# Altium PCB F_300.PcbDoc (part 2 of 3)
Units mil, origin at the board's own origin, x right, y up, seen from the top; angles counter-clockwise.
Board outline 3770 x 3800 mil, 4 copper layers (Top Layer, DGND, VCC, Bottom Layer), stack 30.634 mil thick; 207 components, 290 nets, 1124 pads, 648 vias.
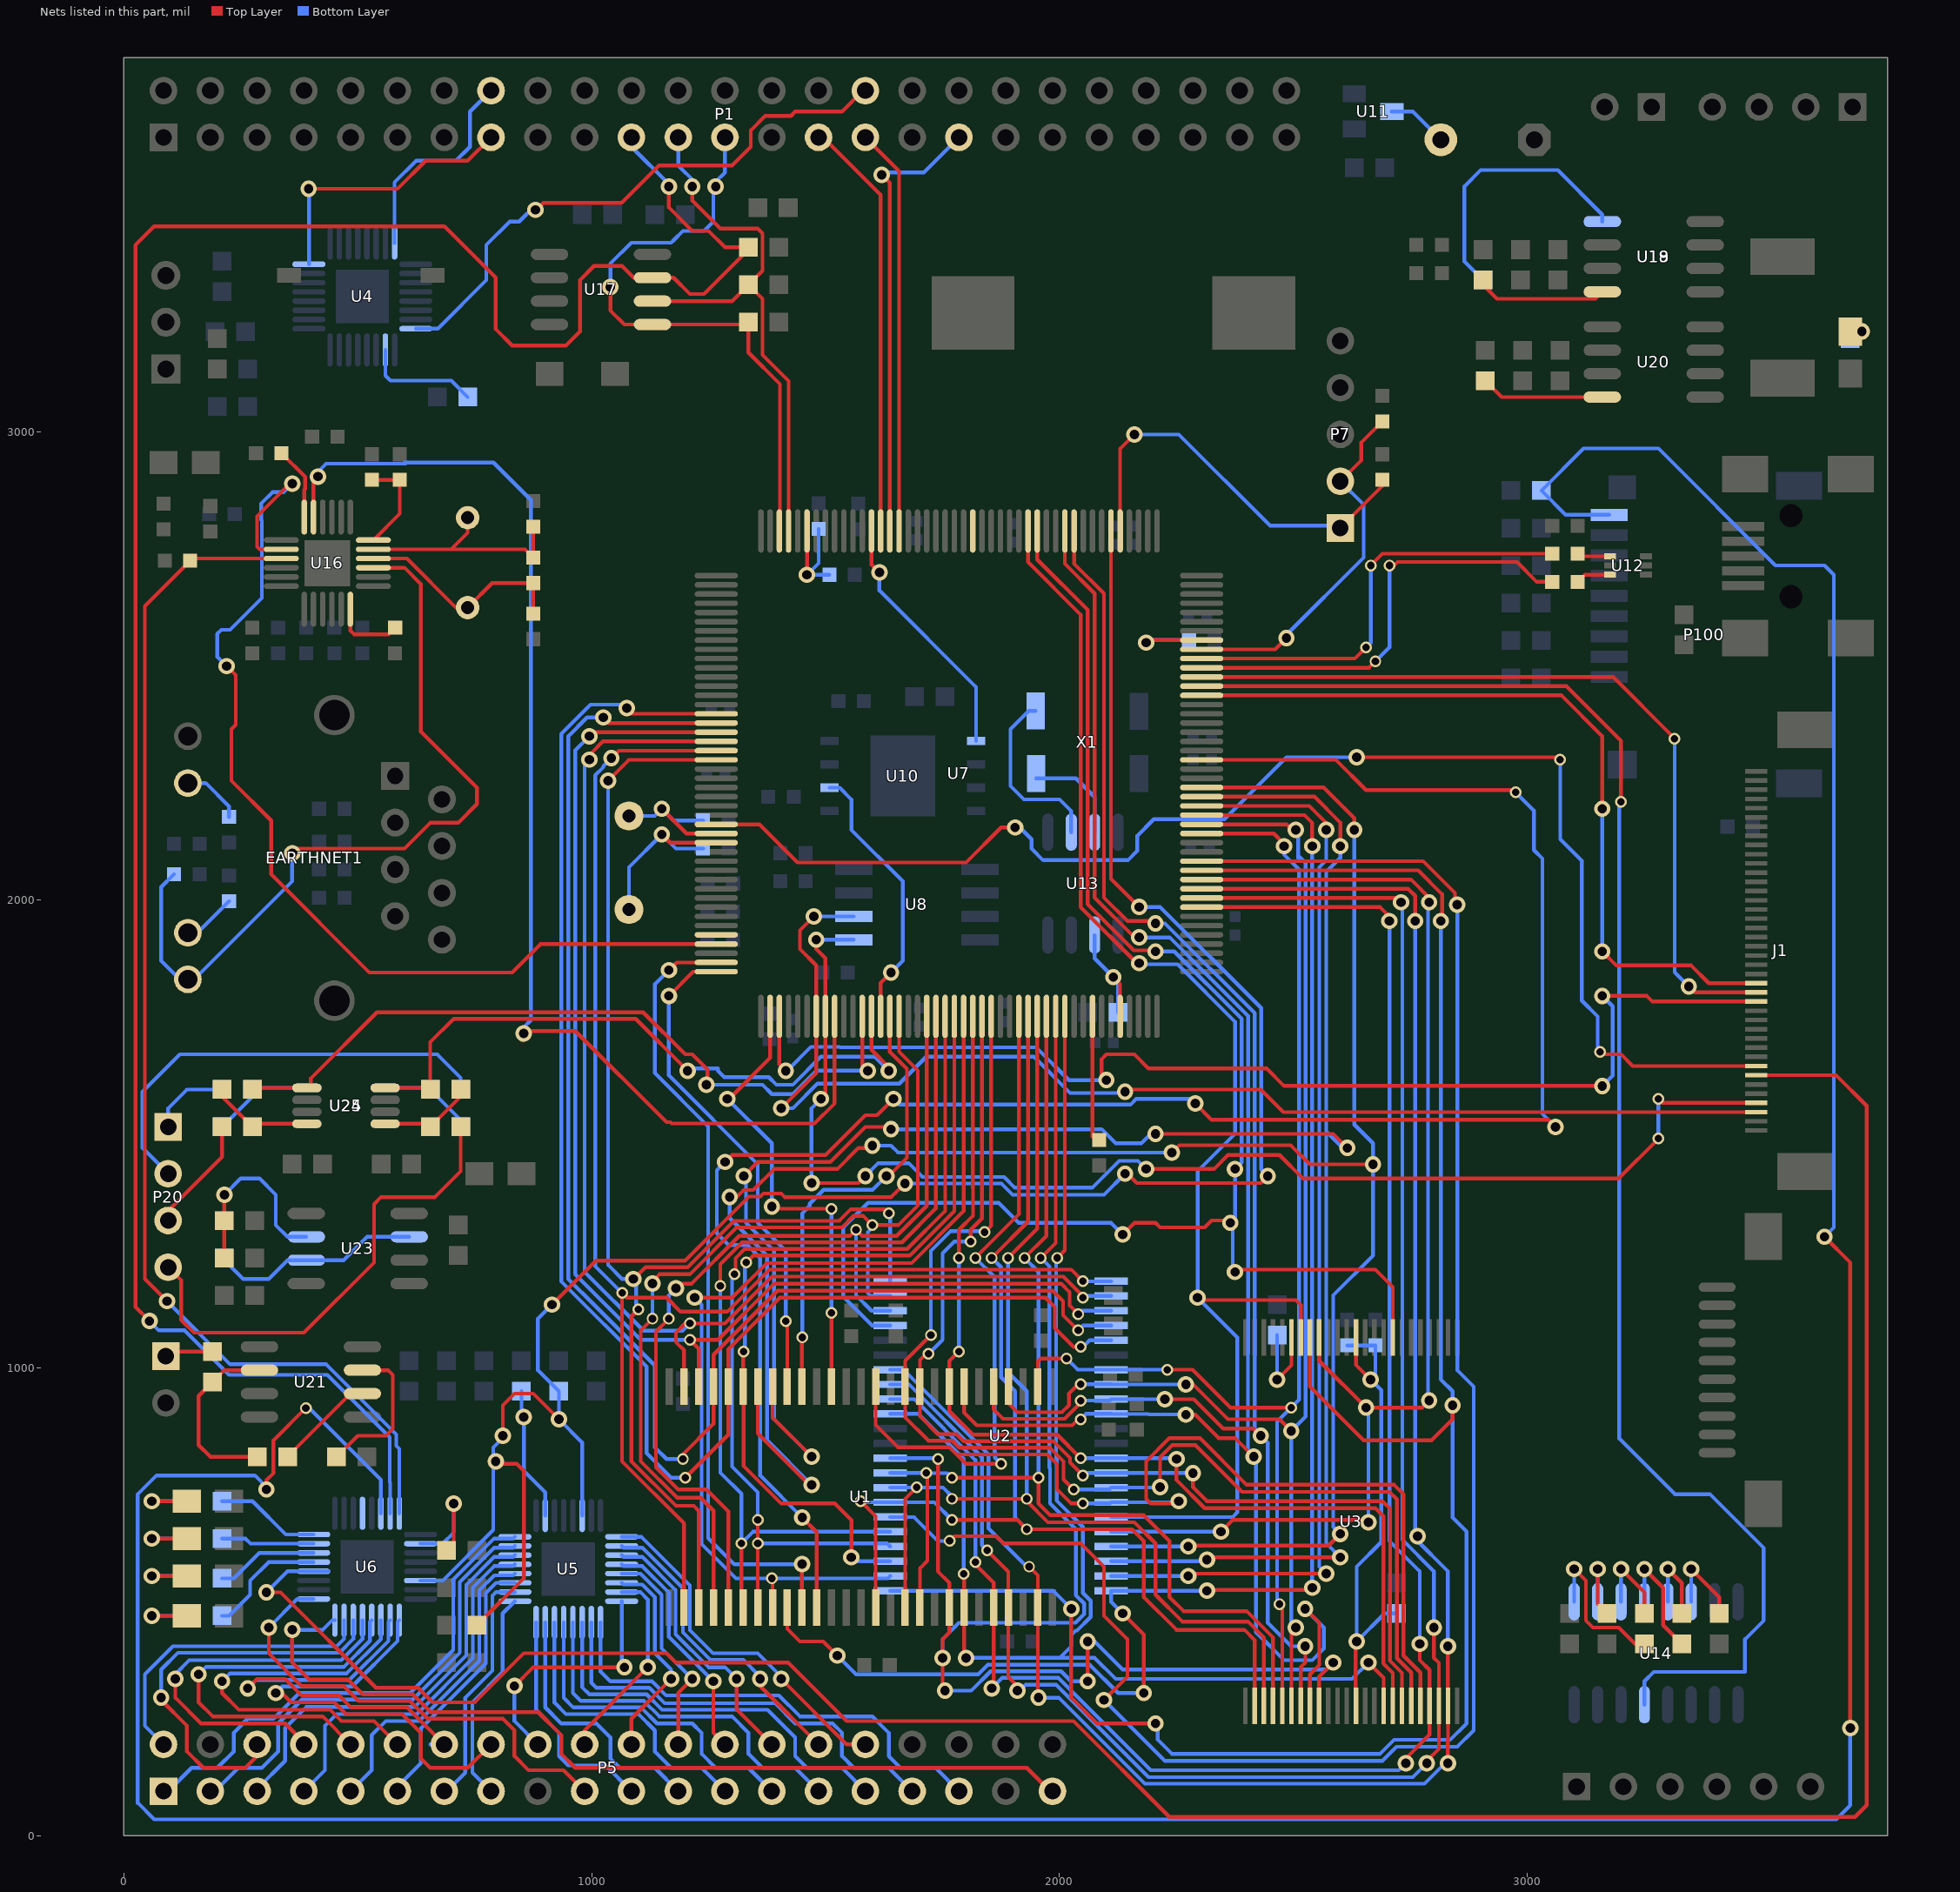
[diagram p4: the nets of this part, all layers, seen from the top]

## Via types
v1: diameter 35, hole 20, Top Layer to Bottom Layer, 496 vias
v2: diameter 25, hole 16, Top Layer to Bottom Layer, 109 vias
v3: diameter 19.68, hole 7.87, Top Layer to Bottom Layer, 31 vias
v4: diameter 120, hole 120, Top Layer to Bottom Layer, 5 vias
v5: diameter 50, hole 28, Top Layer to Bottom Layer, 3 vias
v6: diameter 110, hole 110, Top Layer to Bottom Layer, 2 vias
v7: diameter 38, hole 28, Top Layer to Bottom Layer, 1 vias
v8: diameter 80, hole 50, Top Layer to Bottom Layer, 1 vias

## Nets (pads, with @x,y where several pads share a name; then routed paths per layer and width w, separated by ;. In a path a pad name is that pad's centre, name@x,y a point inside that pad or via, vN(x,y) a via of type N, cw(c..) or ccw(c..) an arc to the next point about the centre after c; other vN are vias at no path point) (continued)
ETH_RESET: R58.1 U6.24 U16.15 | length 2628.1
  Top Layer w8: v1(92.5,1142.5) 45,1190 45,2628 R58.1@142,2725 146.84,2729.84 U16.15@336.57,2729.84
  Bottom Layer w8: v1(92.5,1142.5) 87.5,1137.5 97.5,1137.5 227.5,1007.5 432.5,1007.5 582.5,857.5 582.5,833.61 588.98,827.13 U6.24@588.98,689.09
FREE1: P1.15 U4.8 | length 597.1
  Top Layer w8: v1(395,3520) 585,3520 645,3580 735,3580 P1.15@785,3630
  Bottom Layer w8: v1(395,3520) 395.75,3519.25 U4.8@395.75,3358.82
FREE2: P1.16 U4.16 | length 461.1
  Bottom Layer w8: U4.16@578.82,3404.09 578.82,3533.82 625,3580 710,3580 740,3610 740,3685 P1.16@785,3730
FREE3: P1.32 U4.24 | length 1240.3
  Top Layer w8: v1(880,3475) 881.5,3475 896.5,3490 1063.69,3490 1143.69,3570 1300,3570 1340,3610 1340,3645 1371,3676 1426,3676 1435,3685 1535,3685 1580,3730 P1.32@1585,3730
  Bottom Layer w8: U4.24@624.09,3221.02 671.02,3221.02 775,3325 775,3400 825,3450 845,3450 v1@880,3485
FSMC_A0: U1.23 U2.5 U7.16 | length 3338.2
  Top Layer w8: v1(1075,2410) 1075,2405 1082.05,2397.95 U7.16@1266.3,2397.95 ; v2(1200,765) 1292.09,857.09 U1.23@1292.09,960 1292.09,1040 1402.09,1150 1970,1150 1990,1130 1990,1085 2030,1045 v2(2045,1045)
  Bottom Layer w8: v1(1075,2410) 1067.5,2417.5 997.5,2417.5 935,2355 935,1185 1117.5,1002.5 1117.5,817.5 1170,765 v2(1200,765) ; v2(2045,1045) 2050,1045 2064.04,1059.04 U2.5@2110.35,1059.04
FSMC_A1: U1.24 U2.4 U7.17 | length 3208.8
  Top Layer w8: v1(1025,2390) 1036.73,2378.27 U7.17@1266.3,2378.27 ; v2@1195,815 1260.59,880.59 U1.24@1260.59,960 1260.59,1028.3 1397.29,1165 1985,1165 2007.5,1142.5 2007.5,1112.5 v2(2040,1080)
  Bottom Layer w8: v1(1025,2390) 990,2390 950,2350 950,1189.8 1004.8,1135 1005,1135 1135,1005 1135,830 1160,805 v2(1195,805) ; v2(2040,1080) 2050.54,1090.54 U2.4@2110.35,1090.54
FSMC_A2: U1.25 U2.3 U7.18 | length 2804.7
  Top Layer w8: v1(995,2350) 1003.58,2358.58 U7.18@1266.3,2358.58 ; 1229.09,1000 1229.09,1040.91 v2(1210,1060) 1270,1060 1390,1180 2003.38,1180 2021.5,1161.88 2021.5,1133.5 v2(2040,1115)
  Bottom Layer w8: v1(995,2350) 965,2320 965,1200 1105,1060 v2(1210,1060) ; v2(2040,1115) 2047.03,1122.03 U2.3@2110.35,1122.03
FSMC_A3: U1.26 U2.2 U7.19 | length 2803.7
  Top Layer w8: v1(995,2300) 995,2310 1023.9,2338.9 U7.19@1266.3,2338.9 ; U1.26@1197.6,960 1197.6,1037.4 1180,1055 1180,1075 1200,1095 v2(1210,1095) 1210.35,1094.65 1284.85,1094.65 1385.2,1195 1590,1195 1590,1196 1595,1196 ; 1595,1195 2008.18,1195 2050,1153.18 v2(2050,1150)
  Bottom Layer w8: v1(995,2300) 985,2290 985,1205 1110.8,1079.2 1194.2,1079.2 v2(1210,1095) ; v2@2046.47,1153.53 U2.2@2110.35,1153.53
FSMC_A4: U1.29 U2.1 U7.20 | length 3249.1
  Top Layer w8: v1(1041.95,2303.05) 1058.1,2319.21 U7.20@1266.3,2319.21 ; U1.29@1197.6,487.56 1197.6,667.4 1065,800 v2(1065,1160) 1075,1150 1160,1150 1190,1120 1290,1120 1380,1210 2025,1210 v2(2050,1185)
  Bottom Layer w8: v1(1041.95,2303.05) 1025,2286.11 1025,2283.89 1007.5,2266.39 1007.5,1217.5 v2(1065,1160) ; v2(2050,1185) U2.1@2110.35,1185.02
FSMC_A5: U1.30 U2.44 U7.21 | length 2913.3
  Top Layer w8: v1(1035,2255) 1079.53,2299.53 U7.21@1266.3,2299.53 ; v1(1089,1190) 1090,1190 1115,1215 1205.2,1215 1304.2,1314 1529,1314 1554,1339 1626,1339 v2(1635,1330) ; v2(1100,1125) 1085,1110 1085,800 1180,705 1218.19,705 1229.09,694.09 U1.30@1229.09,487.56
  Bottom Layer w8: v1(1035,2255) 1035,1220 1065,1190 v1(1089,1190) ; v1@1095,1190 1095,1130 v2(1100,1125) ; v2@1635,1335 v2@1637.91,1332.09 ; U2.44@1637.91,1185.02 1637.91,1302.91 ; 1640,1305 1637.91,1302.91 ; v2@1640,1335 1637.91,1332.91 v2@1637.91,1332.09 ; 1637.91,1302.91 v2@1637.91,1332.09
FSMC_A6: U1.31 U2.43 U7.60 | length 2072.9
  Top Layer w8: v2(1130,1105) 1105,1080 1105,800 1182.8,722.2 1232.8,722.2 1260.59,694.41 U1.31@1260.59,487.56 ; v1(1130,1180) 1130,1185 1145,1200 1210,1200 1310,1300 1535,1300 1560,1325 1580,1325 v2(1600,1305) 1655.2,1305 1697.05,1346.85 1697.05,1635.54 1657.05,1675.54 U7.60@1657.05,1751.3
  Bottom Layer w8: v2(1130,1105) v1(1130,1180) ; v2(1600,1305) 1600,1300 1590,1290 1590,1160 1596.47,1153.53 U2.43@1637.91,1153.53
FSMC_A7: U1.32 U2.42 U7.63 | length 2070.8
  Top Layer w8: v2(1165,1105) 1137.5,1077.5 1137.5,787.5 1185,740 1245,740 1292.09,692.91 U1.32@1292.09,487.56 ; v1(1180,1170) 1170,1180 1213.58,1180 1315.58,1282 1552,1282 v2(1565,1295) 1578,1282 1652,1282 1716.1,1346.1 U7.63@1716.1,1751.3
  Bottom Layer w8: v2(1165,1105) 1165,1155 v1(1180,1170) ; v2(1565,1295) 1565,1155 1597.97,1122.03 U2.42@1637.91,1122.03
FSMC_A8: U1.33 U2.27 U7.64 | length 2002.9
  Top Layer w8: v2(1275,1175) 1275,1221.62 1321.38,1268 1663,1268 1735.79,1340.79 U7.64@1735.79,1751.3 ; v2(1320,625) 1320,491.14 U1.33@1323.58,487.56
  Bottom Layer w8: v2(1275,1175) 1275,776 1320,731 v2(1320,625) 1344.59,649.59 U2.27@1637.91,649.59
FSMC_A9: U1.34 U2.26 U7.65 | length 1964.3
  Top Layer w8: v2(1305,1200) 1307.5,1202.5 1307.5,1234.32 1327.18,1254 1674.2,1254 1755.47,1335.27 U7.65@1755.47,1751.3 ; v2(1355,675) v2(1355,625) 1355,615 1355.08,614.92 U1.34@1355.08,487.56
  Bottom Layer w8: v2(1305,1200) 1300,1195 1300,789 1355,734 v2(1355,675) ; v2(1355,625) 1631.01,625 U2.26@1637.91,618.09
FSMC_A10: U1.22 U2.25 U7.66 | length 1795.1
  Top Layer w8: v2(1325,1035) 1320,1035 1323.58,1031.42 U1.22@1323.58,960 1325,958.58 1325,790 1405,710 1520,710 1555,675 v1(1555,595) ; v2(1330,1225) 1345,1240 1680,1240 1775.16,1335.16 U7.66@1775.16,1751.3
  Bottom Layer w8: v2(1325,1035) 1327.5,1037.5 1327.5,1222.5 v2(1330,1225) ; v1(1555,595) 1563.4,586.6 U2.25@1637.91,586.6
FSMC_A11: U1.35 U2.24 U7.67 | length 2099.3
  Top Layer w8: v1(1220,1150) 1300.2,1150 1374.2,1224 1684,1224 1794.84,1334.84 U7.67@1794.84,1751.3 ; v2(1385,550) 1386.57,548.43 U1.35@1386.57,487.56
  Bottom Layer w8: v1(1220,1150) 1235,1135 1235,623.28 1308.28,550 v2(1385,550) 1632.81,550 U2.24@1637.91,555.1
FSMC_A12: U1.36 U2.22 U7.106 | length 3454.1
  Top Layer w8: U1.36@1418.07,487.56 1418.07,441.93 1445,415 1495,415 v1(1525,385) ; v1(2135,475) 2180,430 v1(2180,305) ; U7.106@2303.7,2181.42 2523.58,2181.42 2540,2165 v1(2540,2115) ; v1(2315,523.61) 2315,525 2535,525 v1(2540,530)
  Bottom Layer w8: v1(1525,385) 1565,345 1826.31,345 1846.81,365.5 2064.5,365.5 2125,305 v1(2180,305) ; v1(2135,475) 2110.35,499.65 U2.22@2110.35,523.61 v1(2315,523.61) ; v1(2540,2115) v1(2540,530) v1@2550,520
FSMC_A13: U2.21 U7.107 | length 2363.2
  Top Layer w8: v1@2285,555.1 2285,560 v1(2570,560) ; U7.107@2303.7,2201.1 2533.9,2201.1 2570,2165 v1(2570,2150)
  Bottom Layer w8: U2.21@2110.35,555.1 v1@2285,555.1 ; v1(2570,560) 2555,575 2555,2070 2570,2085 v1(2570,2150)
  other v1: 2275,555
FSMC_A14: U1.20 U2.20 U7.108 | length 4689.7
  Top Layer w8: v1(1325,1410) 1355,1440 1510,1440 1585,1515 1635,1515 v1(1640,1510) ; U1.20@1386.57,960 1386.57,893.43 v1(1470,810) ; v1(2205,1500) 2585,1500 v1(2615,1470) ; U7.108@2303.7,2220.79 2545,2220.79 2600,2165.79 v1(2600,2115) ; v1(2315,590) 2320,595 v1(2600,595)
  Bottom Layer w8: v1(1325,1410) 1330,1410 1330,1310 1390,1250 1390,890 v1(1470,810) ; v1(1640,1510) 2090,1510 2120,1480 2175,1480 2200,1505 v1(2205,1500) ; U2.20@2110.35,586.6 2311.6,586.6 2315,586.6 v1(2315,590) ; v1(2600,595) 2570,625 2570,1505 ; v1(2600,2115) 2600,2090 2570,2060 2570,1505 ; v1(2615,1470) 2605,1470 2570,1505
FSMC_A15: U1.21 U2.19 U7.109 | length 4815.7
  Top Layer w8: v1(1295,1365) 1310,1365 1325,1380 1345,1380 1390,1425 1525,1425 1570,1470 1595,1470 v1(1600,1475) ; U1.21@1355.08,960 1355.08,859.92 1465,750 v1(1470,750) ; v1(2240,1460) 2256,1476 2494,1476 2535,1435 v1(2670,1435) ; v1@2285,620 2575,620 v1@2590,635 ; U7.109@2303.7,2240.47 2564.53,2240.47 2630,2175 v1(2630,2150)
  Bottom Layer w8: v1(1295,1365) 1295,1320 1375,1240 1375,845 v1(1470,750) ; v1(1600,1475) 1640,1475 1655,1460 v1(2240,1460) ; U2.19@2110.35,618.09 v1(2275,618.09) ; v1(2600,645) 2585,660 2585,1155 2670,1240 v1(2670,1435) 2670,1480 2630,1520 v1(2630,2150)
FSMC_A16: U2.18 U3.16 U7.99 | length 2726.4
  Top Layer w8: U7.99@2303.7,2043.62 2751.38,2043.62 2790,2005 v1(2790,1995) ; v1(2345,650) 2370,675 2655,675 v1(2660,670) ; U3.16@2554.73,1065 2554.73,1015.27 v1(2655,915) 2775,915 v1(2790,930)
  Bottom Layer w8: U2.18@2110.35,649.59 2344.59,649.59 v1(2345,650) ; v1(2655,915) 2660,910 v1(2660,670) ; v1(2790,930) 2787.5,927.5 2787.5,1992.5 v1(2790,1995)
FSMC_A17: U2.23 U3.17 U7.100 | length 4366.8
  Top Layer w8: v1@2030,480 v1(2025,485) 2025,295 2080,240 v1@2195,240 ; U7.100@2303.7,2063.31 2766.69,2063.31 2817.5,2012.5 2817.5,1957.5 v1(2815,1955) ; U3.17@2535.04,1065 2535.04,959.96 2650,845 2795,845 2840,890 v1(2840,920)
  Bottom Layer w8: U2.23@1637.91,523.61 1986.39,523.61 v1(2025,485) ; v1(2205,240) 2210,235 2210,205 2240,175 2685,175 2715,205 2835,205 2870,240 2870,650 2840,680 v1(2840,920) 2840,950 2815,975 v1(2815,1955)
FSMC_A18: U2.28 U7.101 | length 4082.5
  Top Layer w8: v2(1765,630) 1775,640 1865,640 1880,625 2045,625 2095,575 2095,470 2145,420 2145,340 v1(2095,290) ; U7.101@2303.7,2082.99 2777.01,2082.99 2845,2015 2845,1995 v1(2850,1990)
  Bottom Layer w8: U2.28@1637.91,681.09 1688.91,681.09 1740,630 v2(1765,630) ; v1(2095,290) 2225,160 2690,160 2720,190 2850,190 2885,225 2885,960 2850,995 v1(2850,1990)
FSMC_D0: U1.2 U2.7 U3.29 U7.104 | length 2704.2
  Top Layer w8: U1.2@1953.5,960 1953.5,1013.5 1960,1020 v2(2015,1020) ; v2(2230,996.05) 2283.95,996.05 2365,915 v2(2495,915) ; U7.104@2303.7,2142.05 2457.95,2142.05 2480,2120 v1(2480,2115) ; v2(2470,495) 2475.99,489.01 U3.29@2475.99,277.6
  Bottom Layer w8: v2(2015,1020) 2038.95,996.05 U2.7@2110.35,996.05 v2(2230,996.05) ; v2@2465,495 2465,885 v2(2495,915) 2512,932 2512,2065 2480,2097 v1(2480,2115)
FSMC_D1: U1.4 U2.8 U3.30 U7.105 | length 2844
  Top Layer w8: U1.4@1890.51,960 1890.51,924.49 1910,905 2005,905 2020,920 2020,945 2040,965 v2(2045,965) ; v1@2270,965 v1(2270,964.55) 2285.45,964.55 2360,890 2470,890 v1(2495,865) ; U7.105@2303.7,2161.73 2485,2161.73 2496.73,2150 v1(2505,2150) ; U3.30@2495.67,277.6 2495.67,435.67 v1(2505,445) ; v1@2502.48,447.52 v1@2503.49,448.53
  Bottom Layer w8: v2(2045,965) 2109.91,965 U2.8@2110.35,964.55 v1(2270,964.55) ; v1(2505,445) 2495,455 v1(2495,865) 2526,896 2526,2079 2510,2095 ; v1(2505,2150) 2510,2145 2510,2095 ; 2510,2090 2510,2095
FSMC_D2: U1.5 U2.9 U3.31 U7.142 | length 3462.3
  Top Layer w8: U1.5@1859.02,960 1859.02,910.98 1879,891 2010.8,891 2045,925.2 v2(2045,930) ; U7.142@2031.06,2788.7 2031.06,2718.94 2095,2655 2095,2005 2145,1955 2200,1955 v1(2205,1950) ; v1(2225,933.05) 2286.95,933.05 2350,870 2415,870 v1(2430,855) ; U3.31@2515.36,277.6 2515.36,360.36 2525.18,370.18 2525.18,404.82 v1(2525,405)
  Bottom Layer w8: v2(2045,930) 2107.3,930 U2.9@2110.35,933.05 v1(2225,933.05) ; v1(2205,1950) 2225.2,1950 2417,1758.2 2417,868 v1(2430,855) 2445,840 2445,455 2495,405 v1(2525,405)
FSMC_D3: U1.7 U2.10 U3.32 U7.143 | length 3821.7
  Top Layer w8: U1.7@1796.02,960 1796.02,903.98 1823,877 2027,877 2045,895 v2(2045,890) ; U7.143@2011.38,2788.7 2011.38,2718.62 2075,2655 2075,2005 2160,1920 v1(2170,1920) ; v1(2270,900) 2290,900 2340,850 2375,850 v1(2415,810) ; v1(2525,485) 2555,455 2555,365 2535.04,345.04 U3.32@2535.04,277.6
  Bottom Layer w8: v2(2045,890) 2056.56,901.56 U2.10@2110.35,901.56 v1(2270,900) ; v1(2170,1920) 2235.4,1920 2311.21,1844.19 2311.21,1843.77 2403,1751.99 2403,1030 2402.5,1029.5 2402.5,822.5 v1(2415,810) ; v1@2412.5,807.5 2420,800 2420,435 2480,375 2540,375 2565,400 2565,445 v1(2525,485) v1@2525,490
FSMC_D4: U1.8 U2.13 U3.41 U7.68 | length 2320
  Top Layer w8: v2(1785,1035) 1764.53,1014.53 U1.8@1764.53,960 1764.53,907.47 1815,857 1995.07,857 v2(2045,807.07) ; v2(1785,1235) 1785,1295 1815,1325 1815,1384.53 1814.53,1385 U7.68@1814.53,1751.3 ; v1(2250,805) 2250,760.2 2310.2,700 2675,700 2692.5,682.5 2692.5,528.61 2692,528.11 2692,368 2712.21,347.79 U3.41@2712.21,277.6
  Bottom Layer w8: v2(1785,1035) v2(1785,1235) ; v2(2045,807.07) U2.13@2110.35,807.07 v1@2245,807.07
FSMC_D5: U1.10 U2.14 U3.42 U7.69 | length 2487.1
  Top Layer w8: v2(1720,1030) 1720,1035 1701.54,1016.54 U1.10@1701.54,960 1701.54,896.46 1740,858 1780,858 1795,843 1987,843 2022.5,807.5 2022.5,797.5 v2(2050,770) ; v2(1810,1270) 1810,1295 1834.21,1319.21 U7.69@1834.21,1751.3 ; v1(2285,775) 2285,745 2315,715 2690,715 2706.5,698.5 2706.5,522.81 2706,522.31 2706,374.2 2731.89,348.31 U3.42@2731.89,277.6
  Bottom Layer w8: v2(1720,1030) 1750,1060 1750,1245 1775,1270 v2(1810,1270) ; v2(2050,770) 2055.57,775.57 U2.14@2110.35,775.57 2284.43,775.57 v1(2285,775)
FSMC_D6: U1.11 U2.15 U3.43 U7.70 | length 2705.3
  Top Layer w8: v2(1725,1070) 1670.04,1015.04 U1.11@1670.04,960 1670.04,893.96 1720,844 1770.8,844 1785.8,829 1979.5,829 2008.5,800 2008.5,761.5 v2(2030,740) ; v2(1840,1290) 1853.9,1303.9 U7.70@1853.9,1751.3 ; v1(2215,745) 2215,808.89 2241.11,835 2290,835 2390,735 2705,735 2721,719 2721,379.2 2751.58,348.63 U3.43@2751.58,277.6
  Bottom Layer w8: v2(1725,1070) 1725,1250 1767.5,1292.5 1837.5,1292.5 v2(1840,1290) ; v2(2030,740) 2106.28,740 U2.15@2110.35,744.08 v1@2225,744.08
FSMC_D7: U1.13 U2.16 U3.44 U7.73 | length 3198
  Top Layer w8: U1.13@1607.05,960 1607.05,877.95 1655,830 1765,830 1780,815 ; v2(1820,1235) 1912.95,1327.95 U7.73@1912.95,1751.3 ; v2(1875,795) 1800,795 1780,815 ; v2(2050,710) 2025,710 1994.5,740.5 1994.5,794.2 1973.7,815 1780,815 ; v1(2255,715) 2250,710 2195,710 2185,720 2185,800 2235,850 2300,850 2400,750 2715,750 2735,730 2735,385 2771.26,348.74 U3.44@2771.26,277.6
  Bottom Layer w8: v2(1820,1235) 1861,1194 1861,821.45 1862,820.45 1862,808 v2(1875,795) ; v2(2050,710) 2107.77,710 U2.16@2110.35,712.58 2252.58,712.58 v1(2255,715)
FSMC_D8: U1.42 U2.29 U3.26 U7.74 | length 2575.9
  Top Layer w8: v2(1575,715) 1607.05,682.95 U1.42@1607.05,487.56 ; v2(1770,675) 1910,675 v2(1930,655) 2155,655 2180,630 2180,510 2250,440 2395,440 2416.93,418.07 U3.26@2416.93,277.6 ; v2(1855,1235) 1932.64,1312.64 U7.74@1932.64,1751.3
  Bottom Layer w8: v2(1575,715) 1577.42,712.58 U2.29@1637.91,712.58 1732.42,712.58 v2(1770,675) ; v2(1855,1235) 1875,1215 1875,980 1905,950 1905,680 v2(1930,655)
FSMC_D9: U1.44 U2.30 U3.27 U7.75 | length 2484.2
  Top Layer w8: U1.44@1670.04,487.56 1670.04,720.04 v2(1695,745) ; v2(1770,720) v2(1930,720) ; v2(1890,1235) 1952.32,1297.32 U7.75@1952.32,1751.3 ; v2@1930,715.2 1975.2,670 2159.8,670 2205,624.8 2205,515 2262.4,457.6 2402.6,457.6 2436.62,423.59 U3.27@2436.62,277.6
  Bottom Layer w8: U2.30@1637.91,744.08 1750.92,744.08 1770,725 v2(1770,720) ; v2(1890,1235) 1890,990 1930,950 v2(1930,720)
FSMC_D10: U1.45 U2.31 U3.28 U7.76 | length 2526
  Top Layer w8: U1.45@1701.54,487.56 1701.54,571.54 1717.5,587.5 1717.5,772.5 v2(1715,775) ; v2(1770,765) v2(1955,765) 1955,710 1980,685 2180,685 2235,630 2235,510 2265,480 2400,480 2456.3,423.7 U3.28@2456.3,277.6 ; v2(1925,1235) 1972.01,1282.01 U7.76@1972.01,1751.3
  Bottom Layer w8: U2.31@1637.91,775.57 1714.43,775.57 v2(1715,775) 1760,775 v2(1770,765) ; v2(1925,1235) 1955,1205 v2(1955,765)
FSMC_D11: U1.47 U2.32 U3.33 U7.77 | length 3387.1
  Top Layer w8: v2(1740,805) 1740,565 1764.53,540.47 U1.47@1764.53,487.56 1764.53,434.53 1750,420 v1(1750,380) 1750,315 v1(1755,310) ; v2(1960,1235) 1991.69,1266.69 U7.77@1991.69,1751.3 ; v1(2060,330) v1(2060,415) ; U3.33@2554.73,277.6 2554.73,339.73 v1(2585,370) v1@2590,370
  Bottom Layer w8: U2.32@1637.91,807.07 1732.93,807.07 1735,805 v2(1740,805) ; v1(1750,380) 1750,420 1785,455 2033.89,455 2052.5,473.61 2052.5,496.39 2035,513.89 2035,655 1979.8,710.2 1979.8,785 1978.5,786.3 1978.5,1216.5 v2(1960,1235) ; v1(1755,310) 1811.11,310 1852.61,351.5 2003.3,351.5 2024.8,330 v1(2060,330) ; v1@2065,415 2075,415 2135,355 2570,355 v1(2585,370)
FSMC_D12: U1.48 U2.35 U3.40 U7.78 | length 3062.1
  Top Layer w8: v2(1795,560) 1796.02,558.98 U1.48@1796.02,487.56 1796.02,383.98 v1(1800,380) ; v2(1995,1235) 2011.38,1251.38 U7.78@2011.38,1751.3 ; v1(2660,370) 2692.52,337.48 U3.40@2692.52,277.6
  Bottom Layer w8: U2.35@1637.91,901.56 1698.44,901.56 1795,805 v2(1795,560) ; v1(1800,380) 2000,380 ; v2(1995,1235) 1992.5,1232.5 1992.5,807.1 1993.8,805.8 1993.8,716.2 2050,660 2050,518.69 2066.5,502.19 2066.5,467.81 2037.19,438.5 2034.5,438.5 2025,429 2025,405 2000,380 ; v1(2660,370) 2625,335 2120,335 2075,380 2000,380
FSMC_D13: U1.50 U2.36 U3.45 U7.96 | length 4004.4
  Top Layer w8: v2(1820,585) 1820,580 1859.02,540.98 U1.50@1859.02,487.56 1859.02,319.02 v1(1855,315) ; U7.96@2303.7,1984.57 2685.43,1984.57 2710,1960 v1(2705,1955) ; v1(2740,155) 2740,165 2790.95,215.95 U3.45@2790.95,277.6 2790.95,354.05 2770,375 v1(2770,410)
  Bottom Layer w8: U2.36@1637.91,933.05 1690,933.05 1820,803.05 v2(1820,585) ; v1(1855,315) 1877.5,337.5 1997.5,337.5 2195,140 2725,140 v1(2740,155) ; v1(2705,1955) 2705,630 2770,565 v1(2770,410)
FSMC_D14: U1.51 U2.37 U3.46 U7.97 | length 4086.5
  Top Layer w8: v2(1845,610) 1890.51,564.49 U1.51@1890.51,487.56 1890.51,339.49 1915,315 v1(1910,310) ; U7.97@2303.7,2004.25 2725.75,2004.25 2730,2000 v1(2730,1995) ; v1(2785,155) 2785,160 2810.63,185.63 U3.46@2810.63,277.6 2810.63,369.37 2800,380 v1(2800,445)
  Bottom Layer w8: U2.37@1637.91,964.55 1678.3,964.55 1834,808.85 1834,621 v2(1845,610) ; v1(1910,310) 1915,310 1927.5,322.5 1992.7,322.5 2190.2,125 2755,125 v1(2785,155) ; v1(2730,1995) 2732.5,1992.5 2732.5,632.5 2800,565 v1(2800,445)
FSMC_D15: U1.53 U2.38 U3.47 U7.98 | length 4193.9
  Top Layer w8: v2(1935,575) 1953.5,556.5 U1.53@1953.5,487.56 1953.5,296.5 v1(1955,295) ; U7.98@2303.7,2023.94 2745,2023.94 2760,2008.94 v1(2760,1955) ; v1@2763.3,638.3 v1(2765,640) ; v1(2830,155) 2830,205 2830.32,205.32 U3.47@2830.32,277.6 ; U3.47@2830,274.45 v1(2830,405)
  Bottom Layer w8: U2.38@1637.91,996.05 1666.61,996.05 1848,814.65 1848,657 1930,575 v2(1935,575) ; v1(1955,295) 1998.28,295 2182.28,111 2779.89,111 2823.89,155 v1(2830,155) v1@2840,145 ; v1(2760,1955) v1@2760,635 ; v1(2765,640) v1@2760,635 ; v1(2830,405) 2830,565 v1@2760,635
FSMC_NE3: U7.153
FSMC_NOE: U2.41 U3.8 U7.146 | length 3434
  Top Layer w8: U7.146@1952.32,2788.7 1952.32,2727.68 2060,2620 2060,1991.11 2158.61,1892.5 2202.5,1892.5 v1(2205,1890) ; v1(2135,1285) 2160,1310 2205,1310 2215,1300 2310,1300 2325,1315 2360,1315 v1(2365,1310) ; v1(2375,1205) 2380,1210 2675,1210 2712.21,1172.79 2712.21,1105
  Bottom Layer w8: U2.41@1637.91,1090.54 1599.46,1090.54 1537.5,1152.5 1537.5,1300 1538.18,1300 1590.68,1352.5 1870,1352.5 1912.5,1310 2110,1310 v1(2135,1285) ; v1(2205,1890) 2245.19,1890 2389,1746.19 2389,1439 v1(2375,1425) 2375,1320 v1@2370,1315 ; v1(2365,1310) v1@2370,1315 ; v1(2375,1205) 2380,1205 2370,1215 v1@2370,1315
FSMC_NWE: U2.17 U3.18 U7.147 | length 2969.1
  Top Layer w8: U7.147@1932.64,2788.7 1932.64,2722.36 2045,2610 2045,1985 2165,1865 v1(2170,1865) ; v1(2295,1150) 2300,1145 2505,1145 2515.36,1134.64 U3.18@2515.36,1065
  Bottom Layer w8: U2.17@2110.35,681.09 2370,681.09 2380,691.09 2380,1065 v1(2295,1150) 2295,1420 2375,1500 2375,1740 2252.5,1862.5 2172.5,1862.5 v1(2170,1865)
FSMC_SDCKE0: U1.37 U7.43 | length 1699.4
  Top Layer w8: v1(1165,1850) 1181.46,1866.46 U7.43@1266.3,1866.46 ; U1.37@1449.57,487.56 v1(1449.57,580.43)
  Bottom Layer w8: v1(1165,1850) 1135,1820 1135,1630 1249,1516 1249,636 1305,580 1450,580 v1(1449.57,580.43)
FSMC_SDCLK: U1.38 U7.112 | length 4394
  Top Layer w8: v1(1285,1440) 1300,1455 1500,1455 1585,1540 1610,1540 v1(1645,1575) ; v1(1450,680) 1481.06,648.94 U1.38@1481.06,487.56 ; v1(2290,1565) 2325,1530 3045,1530 v1(3060,1515) ; U7.112@2303.7,2299.53 2590.47,2299.53 2655,2235 2970,2235 v2(2975,2230)
  Bottom Layer w8: v1(1285,1440) 1267.5,1422.5 1267.5,1287.5 1292.4,1262.6 1332.6,1262.6 1360,1235.2 1360,770 v1(1450,680) ; v1(1645,1575) 1657.5,1562.5 2151.39,1562.5 2163.89,1575 2290,1575 v1(2290,1565) ; v2(2975,2230) 3014,2191 3014,2106.6 3032,2088.6 3032,1543 v1(3060,1515)
FSMC_SDNE0: U1.19 U7.44 | length 1067.1
  Top Layer w8: v1(1165,1795) 1216.77,1846.77 U7.44@1266.3,1846.77 ; v2(1415,1100) 1420,1100 1418.07,1098.07 U1.19@1418.07,960
  Bottom Layer w8: v1(1165,1795) 1165,1625 1355,1435 1355,1310 1415,1250 v2(1415,1100)
FSMC_SDNRAS: U1.18 U7.59 | length 958.7
  Top Layer w8: U1.18@1449.57,960 1449.57,1064.57 v2(1450,1065) ; v1@1635,1410 1673.9,1448.9 1673.9,1638.9 1637.36,1675.43 U7.59@1637.36,1751.3
  Bottom Layer w8: v2(1450,1065) 1450,1330 1466,1346 1466,1350.8 1495.7,1380.5 1600.5,1380.5 v1(1630,1410)
FSMC_SDNWE: U1.16 U7.46 | length 998.3
  Top Layer w8: v1(1290,1575) 1293.89,1575 1381.46,1662.57 U7.46@1381.46,1751.3 ; v1(1385,1345) 1385,1340 v2(1512.5,1340) ; U1.16@1512.56,960 v2(1512.56,1117.56)
  Bottom Layer w8: v1(1290,1575) 1385,1480 v1(1385,1345) ; v2(1512.5,1340) 1512.5,1117.62 v2(1512.56,1117.56)
I2C_SCL: P1.23 R53.1 U7.173 U17.6 | length 1234.3
  Top Layer w8: U17.6@1130,3280 1300,3280 R53.1@1335,3315 ; v1@1215,3530 1215,3495 1275,3435 1355,3435 1365,3425 1365,3345 R53.1@1335,3315 ; U7.173@1420.83,2788.7 1420.83,3109.17 1365,3165 1365,3285 R53.1@1335,3315
  Bottom Layer w8: P1.23@1185,3630 1185,3570 1220,3535 v1@1215,3530
  other v1: 1215,3525
I2C_SDA: P1.25 R54.1 U7.174 U17.5 | length 1332
  Top Layer w8: v1(1040,3310) 1040,3260 1070,3230 U17.5@1130,3230 1330,3230 R54.1@1335,3235 1335,3170 1402.5,3102.5 1402.5,2790.06 U7.174@1401.14,2788.7
  Bottom Layer w8: v1(1040,3310) 1040,3360 1085,3405 1170,3405 1175,3410 1195,3430 1240,3430 1260,3450 1260,3525 1265,3530 1265,3535 1285,3555 P1.25@1285,3630
  other v1: 1265,3525
I2C_WP: P1.21 R52.1 U6.23 U17.7 | length 5180.6
  Top Layer w8: v1(55,1100) 25,1130 25,3400 65,3440 685,3440 795,3330 795,3220 830,3185 945,3185 975,3215 975,3325 1005,3355 1065,3355 1090,3330 U17.7@1130,3330 1175,3330 1210,3295 1240,3295 1335,3390 R52.1@1335,3395 1285,3395 1250,3430 1215,3430 1165,3480 v1@1165,3530
  Bottom Layer w8: v1(55,1100) 75,1080 130,1080 225,985 435,985 568.5,851.5 568.5,755.79 569.29,755 U6.23@569.29,689.09 ; P1.21@1085,3630 1085,3610 v1@1165,3530
  other v1: 1165,3525
INX+: P20.3 R83.2 | length 247.6
  Top Layer w8: P20.3@95,1315 95,1335.94 210,1450.95 R83.2@210,1515
INX-: P20.4 R82.2 | length 1043.9
  Top Layer w8: P20.4@95,1215 122.5,1187.5 122.5,1102.5 150,1075 385,1075 535,1225 535,1350 550,1365 665,1365 720,1420 R82.2@720,1515
INY+: P20.1 R79.2 | length 171.6
  Bottom Layer w8: P20.1@95,1515 95,1555 135,1595 R79.2@210,1595
INY-: P20.2 R78.2 | length 956.6
  Bottom Layer w8: P20.2@95,1415 40,1470 40,1590 120,1670 670,1670 720,1620 R78.2@720,1595
IO_1302: R41.1 U7.84 U13.6 | length 282.5
  Top Layer w8: v1@2110,1835 v1(2115,1835) 2129.49,1820.51 U7.84@2129.49,1751.3
  Bottom Layer w8: U13.6@2075,1925 2075,1875 v1(2115,1835) ; v1@2110,1835 2125,1820 R41.1@2125,1760
KEY1: P5.6 U6.6 | length 890.5
  Top Layer w8: v1(80,295) 80,290 135,235 135,180 170,145 260,145 285,170 P5.6@285,195
  Bottom Layer w8: v1(80,295) 80,355 116,391 461,391 490.55,420.55 U6.6@490.55,460.75 ; P5.6@285,195 P5.6@300,195
KEY2: P5.8 U6.5 | length 841.1
  Top Layer w8: v1(110,335) 110,295 165,240 345,240 385,200 P5.8@385,195
  Bottom Layer w8: v1(110,335) 110,345 140,375 464.8,375 510.24,420.44 U6.5@510.24,460.75
KEY3: P5.10 U6.4 | length 868.7
  Top Layer w8: v1(160,345) 160,285 190,255 425,255 P5.10@485,195
  Bottom Layer w8: v1(160,345) 176,361 470.6,361 526.14,416.54 526.14,456.97 U6.4@529.92,460.75 ; P5.10@485,195 P5.10@489.92,195
KEY4: P5.12 U6.3 | length 869.6
  Top Layer w8: v1(210,330) 210,305 246,269 441,269 465,245 535,245 P5.12@585,195
  Bottom Layer w8: v1(210,330) 227,347 476.4,347 549.61,420.21 U6.3@549.61,460.75 ; P5.12@585,195 P5.12@589.61,199.61
KEY5: P5.14 U6.2 | length 904.8
  Top Layer w8: v1(265,315) 285,335 345,335 380,300 460,300 486,274 606,274 P5.14@685,195
  Bottom Layer w8: v1(265,315) 283,333 482.2,333 565.51,416.32 565.51,456.97 U6.2@569.29,460.75 ; 655,195 P5.14@685,195
KEY6: P5.16 U6.1 | length 931.6
  Top Layer w8: v1(325,305) 338,305 358,285 450,285 475,260 595,260 635,220 635,165 655,145 735,145 P5.16@785,195
  Bottom Layer w8: v1(325,305) 339,319 487.99,319 585.2,416.2 585.2,456.97 U6.1@588.98,460.75
KEY7: P5.32 U5.1 | length 763.6
  Top Layer w8: v1(1405,335) 1545,195 P5.32@1585,195
  Bottom Layer w8: U5.1@1064.25,638.98 1106.02,638.98 1210,535 1210,439.4 1259.4,390 1355,390 1405,340 v1(1405,335)
KEY8: P5.30 U5.2 | length 663.5
  Top Layer w8: v1(1360,335) 1360,320 P5.30@1485,195
  Bottom Layer w8: U5.2@1064.25,619.29 1068.03,615.51 1108.48,615.51 1195,528.99 1195,434.6 1253.6,376 1324,376 1360,340 v1(1360,335)
KEY9: P5.28 U5.3 | length 581.7
  Top Layer w8: v1(1310,335) 1310,270 P5.28@1385,195
  Bottom Layer w8: U5.3@1064.25,599.61 1068.03,595.83 1108.37,595.83 1179.2,525 1179.2,430.6 1249.8,360 1285,360 v1(1310,335)
KEY10: P5.26 U5.4 | length 499.9
  Top Layer w8: v1(1260,330) 1260,220 P5.26@1285,195
  Bottom Layer w8: U5.4@1064.25,579.92 1068.03,576.14 1108.26,576.14 1165,519.4 1165,425 v1(1260,330)
KEY11: P5.24 U5.5 | length 463.6
  Top Layer w8: P5.24@1185,195 1185,305 v1(1215,335)
  Bottom Layer w8: U5.5@1064.25,560.24 1104.36,560.24 1149.6,515 1149.6,400.4 v1(1215,335)
KEY12: P5.22 U5.6 | length 448
  Top Layer w8: P5.22@1085,195 1085,250 v1(1170,335)
  Bottom Layer w8: U5.6@1064.25,540.55 1068.03,536.77 1108.03,536.77 1135,509.8 1135,390 1170,355 v1(1170,335)
KEY13: P5.20 U5.7 | length 428.2
  Top Layer w8: P5.20@985,195 985,225 v1(1120,360)
  Bottom Layer w8: U5.7@1064.25,520.87 1104.13,520.87 1120,505 v1(1120,360)
KEY14: P5.18 U5.8 | length 557.9
  Top Layer w8: v1(1070,360) 875,360 v1(835,320) ; v1(835,320) 830,320 835,315 v1(835,320)
  Bottom Layer w8: v1(835,320) 835,245 P5.18@885,195 ; U5.8@1064.25,501.18 1064.25,365.75 v1(1070,360)
KEY15: P5.35 U5.9 | length 1006.2
  Bottom Layer w8: U5.9@1018.98,455.91 1018.98,351.02 1040,330 1128.99,330 1158.99,300 1400,300 1445,255 1600,255 1635,220 1635,170 1660,145 1735,145 P5.35@1785,95
KEY16: P5.33 U5.10 | length 940.2
  Bottom Layer w8: U5.10@999.29,455.91 999.29,326.71 1010,316 1123.2,316 1156.2,283 1392,283 1435,240 1515,240 1535,220 1535,170 1560,145 1635,145 P5.33@1685,95
KEY17: P5.31 U5.11 | length 859.5
  Bottom Layer w8: U5.11@979.61,455.91 979.61,317.39 995,302 1117.4,302 1150.4,269 1376,269 1435,210 1435,170 1460,145 1535,145 P5.31@1585,95
KEY18: P5.29 U5.12 | length 789.3
  Bottom Layer w8: U5.12@959.92,455.91 959.92,305.08 977,288 1111.6,288 1144.6,255 1300,255 1335,220 1335,175 1365,145 1435,145 P5.29@1485,95
KEY19: P5.27 U5.13 | length 715
  Bottom Layer w8: U5.13@940.24,455.91 940.24,294.76 961,274 1105.8,274 1139.8,240 1215,240 1235,220 1235,175 1265,145 1335,145 P5.27@1385,95
KEY20: P5.25 U5.14 | length 640.7
  Bottom Layer w8: U5.14@920.55,455.91 920.55,284.45 945,260 1100,260 1135,225 1135,180 1170,145 1235,145 P5.25@1285,95
KEY21: P5.23 U5.15 | length 566.5
  Bottom Layer w8: U5.15@900.87,455.91 900.87,274.13 935,240 1010,240 1040,210 1040,165 1060,145 1135,145 P5.23@1185,95
KEY22: P5.21 U5.16 | length 492.2
  Bottom Layer w8: U5.16@881.18,455.91 881.18,268.82 930,220 930,170 950,150 1030,150 P5.21@1085,95
KEY23: P5.15 U5.17 | length 460.4
  Bottom Layer w8: P5.15@785,95 745,135 745,285 809.72,349.72 809.72,475 U5.17@835.91,501.18
KEY24: P5.13 U5.18 | length 514.8
  Bottom Layer w8: P5.13@685,95 690,95 730,135 730,295 788,353 788,513 795.87,520.87 U5.18@835.91,520.87
KEY25: P5.11 U5.19 | length 573
  Bottom Layer w8: P5.11@585,95 585,105 635,155 635,229 774,368 774,518.8 795.75,540.55 U5.19@835.91,540.55
KEY26: P5.9 U5.20 | length 675.9
  Bottom Layer w8: P5.9@485,95 530,140 530,215 560,245 631.2,245 760,373.8 760,524.6 791.86,556.46 832.13,556.46 U5.20@835.91,560.24
KEY27: P5.7 U5.21 | length 795.8
  Bottom Layer w8: P5.7@385,95 430,140 430,235 455,260 626.4,260 746,379.6 746,530.4 791.74,576.14 832.13,576.14 U5.21@835.91,579.92
KEY28: P5.5 U5.22 | length 892.2
  Bottom Layer w8: P5.5@285,95 285,100 345,160 345,230 390,275 621.6,275 732,385.4 732,536.2 791.63,595.83 832.13,595.83 U5.22@835.91,599.61
KEY29: P5.3 U5.23 | length 991.6
  Bottom Layer w8: P5.3@185,95 195,95 245,145 295,145 330,180 330,240 381,291 617.8,291 718,391.2 718,541.99 791.52,615.51 832.13,615.51 U5.23@835.91,619.29
KEY30: P5.1 U5.24 | length 1088.3
  Bottom Layer w8: P5.1@85,95 95,95 145,145 200,145 235,180 235,220 265,250 320,250 375,305 612.01,305 704,396.99 704,542.99 703.6,543.39 703.6,547.4 791.4,635.2 832.13,635.2 U5.24@835.91,638.98
LED_X: P5.2 U6.7 | length 663.7
  Bottom Layer w8: P5.2@85,195 45,235 45,345 105,405 455,405 470.87,420.87 U6.7@470.87,460.75
LED_Y: P5.39 U6.8 | length 1932.7
  Top Layer w8: v1(360,440) 360,370 396,334 480,334 480,333 511,302 617.6,302 655.6,264 886,264 935,215 935,175 965,145 1930,145 1980,95 P5.39@1985,95
  Bottom Layer w8: v1(360,440) 425,440 445.75,460.75 U6.8@451.18,460.75
LED_Z: P5.19 U6.9 | length 1005.6
  Top Layer w8: v1(310,445) 310,390 380,320 470,320 502,288 611.8,288 649.8,250 810,250 835,225 835,170 865,140 940,140 P5.19@985,95
  Bottom Layer w8: v1(310,445) 371.02,506.02 U6.9@405.91,506.02
LINK_LED: EARTHNET1.12 R51.2 U16.3 | length 1714.1
  Top Layer w8: v1(360,2100) 370,2110 600,2110 655,2165 715,2165 755,2205 755,2240 635,2360 635,2675 599.84,2710.16 U16.3@533.43,2710.16
  Bottom Layer w8: R51.2@107.5,2054.94 80,2027.44 80,1870 119.84,1830.16 EARTHNET1.12@137.09,1830.16 150.16,1830.16 360,2040 v1(360,2100)
LTDC_BL: J1.34 U6.12 | length 5626.2
  Top Layer w8: v1(305,520) 335,520 539,316 629,316 660,285 750,285 855,390 1160,390 1180,370 1420,370 1545,245 2030,245 2235,40 3700,40 3725,65 3725,1560 3659.61,1625.39 J1.34@3489,1625.39
  Bottom Layer w8: v1(305,520) 350.08,565.08 U6.12@405.91,565.08 U6.12@438.24,565.08
LTDC_DE: J1.33 U7.28 | length 3037.9
  Top Layer w8: U7.28@1266.3,2161.73 1358.27,2161.73 1440,2080 1800,2080 1875,2155 v1(1905,2155) ; v1(2635,2305) 3065,2305 v2(3070,2300) ; v2(3155,1675) 3155,1670 3200,1670 3224.92,1645.08 J1.33@3489,1645.08
  Bottom Layer w8: v1(1905,2155) 1915,2155 1940,2130 1940,2110 1965,2085 2146,2085 2166,2105 2166,2137.11 2201.39,2172.5 2352.5,2172.5 2485,2305 v1(2635,2305) ; v2(3070,2300) 3070,2130 3116,2084 3116,1785.05 3150,1751.05 3150,1685 3160,1675 v2(3155,1675)
NetC11_1: C11.1 C12.1 R2.2 U3.12 U3.37 | length 1071.4
  Top Layer w8: v1@2632.5,407.5 2632.5,278.56 U3.37@2633.47,277.6 ; U3.12@2633.47,1065 2633.47,1006.53 v1(2665,975)
  Bottom Layer w8: C11.1@2615,1048 C12.1@2675,1048 2675,985 v1(2665,975) 2687.5,952.5 2687.5,627.5 2635,575 v1(2635,415) 2695,475 R2.2@2720,475
NetC14_1: C14.1 U7.81 | length 277.3
  Top Layer w8: U7.81@2070.43,1751.3 2070.43,1494.57 C14.1@2085,1480
NetC15_1: C15.1 U7.125 | length 217.8
  Top Layer w8: v1(2185,2550) 2190.43,2555.43 U7.125@2303.7,2555.43
  Bottom Layer w8: v1(2185,2550) 2185,2555 2185.43,2555.43 C15.1@2276.7,2555.43
NetC18_1: C18.1 U7.29 Y1.1 | length 313.2
  Top Layer w8: v1(1150,2195) 1202.95,2142.05 U7.29@1266.3,2142.05
  Bottom Layer w8: Y1.1@1079.72,2179.63 1134.63,2179.63 v1(1150,2195) 1175,2170 C18.1@1238,2170
NetC19_1: C19.1 U7.30 Y1.2 | length 413.5
  Top Layer w8: v1(1150,2140) 1167.64,2122.36 U7.30@1266.3,2122.36
  Bottom Layer w8: Y1.2@1079.72,1979.63 1079.72,2069.72 v1(1150,2140) 1180,2110 C19.1@1238,2110
NetC40_2: C40.2 U14.2 | length 173.3
  Top Layer w8: v1(3150,570) 3150,495 C40.2@3170,475
  Bottom Layer w8: U14.2@3150,500 v1(3150,570)
NetC41_1: C41.1 U14.1 | length 336.1
  Top Layer w8: v1(3100,570) 3125,545 3125,460 3140,445 3195,445 3230,410 C41.1@3250,410
  Bottom Layer w8: U14.1@3100,500 v1(3100,570)
NetC41_2: C41.2 U14.3 | length 185.7
  Top Layer w8: v1(3200,570) 3250,520 C41.2@3250,475
  Bottom Layer w8: U14.3@3200,500 3200,565 v1(3200,570)
NetC42_1: C42.1 U14.4 | length 263.1
  Top Layer w8: v1(3250,570) 3290,530 3290,450 C42.1@3330,410
  Bottom Layer w8: U14.4@3250,500 v1(3250,570)
NetC42_2: C42.2 U14.5 | length 177.4
  Top Layer w8: v1(3300,570) 3330,540 C42.2@3330,475
  Bottom Layer w8: U14.5@3300,500 v1(3300,570)
NetC43_1: C43.1 U14.6 | length 189.9
  Top Layer w8: v1(3350,570) 3410,510 C43.1@3410,475
  Bottom Layer w8: U14.6@3350,500 3350,565 v1(3350,570)
NetC51_1: C51.1 C52.1 U16.6 | length 212.2
  Top Layer w8: C51.1@530,2898 C52.1@590,2898 590,2825.79 U16.6@533.43,2769.21
NetC58_1: C58.1 R60.2 U16.4 Y2.1 | length 472.2
  Top Layer w8: U16.4@533.43,2729.84 605.16,2729.84 710,2625 Y2.1@735,2625 787.5,2677.5 R60.2@874.94,2677.5 874.94,2612.06 C58.1@875,2612
NetC59_1: C59.1 R60.1 U16.5 Y2.2 | length 497.1
  Top Layer w8: U16.5@533.43,2749.53 699.53,2749.53 ; Y2.2@735,2817.13 735,2785 699.53,2749.53 ; C59.1@875,2798 R60.1@875,2732 857.47,2749.53 699.53,2749.53
NetC60_2: C60.2 U18.4 | length 283.6
  Top Layer w8: C60.2@2905,3325 2905,3315 2935,3285 3145,3285 U18.4@3160,3300
NetC64_2: C64.2 U19.4 | length 580.4
  Bottom Layer w8: C64.2@2905,3325 2865,3365 2865,3525 2900,3560 3065,3560 3160,3465 U19.4@3160,3450
NetC67_2: C67.2 U20.4 | length 264.5
  Top Layer w8: C67.2@2910,3110 2945,3075 U20.4@3160,3075
NetEARTHNET1_10: EARTHNET1.10 R55.2 | length 131.1
  Bottom Layer w8: EARTHNET1.10@137.09,2250 175,2250 224.94,2200.06 R55.2@224.94,2177.5
NetEARTHNET1_11: EARTHNET1.11 R56.2 | length 115.9
  Bottom Layer w8: EARTHNET1.11@137.09,1930 157.56,1930 R56.2@225.06,1997.5
NetL1_1: L1.1 R17.1 | length 160
  Top Layer w8: v1(60,470) L1.1@135,470
  Bottom Layer w8: v1(60,470) 70,470 R17.1@145,470
NetL2_1: L2.1 R18.1 | length 162.1
  Top Layer w8: v1(60,555) L2.1@135,555
  Bottom Layer w8: v1(60,555) 140,555 R18.1@145,550
NetL3_1: L3.1 R19.1 | length 160
  Top Layer w8: v1(60,635) L3.1@135,635
  Bottom Layer w8: v1(60,635) R19.1@145,635
NetL4_1: L4.1 R20.1 | length 160
  Top Layer w8: v1(60,715) L4.1@135,715
  Bottom Layer w8: v1(60,715) R20.1@145,715
NetL7_1: L7.1 R65.2
  other v1: 3715,3215
NetP21_1: P21.1 R73.1 | length 104.1
  Top Layer w8: P21.1@90,1025 100,1035 R73.1@190,1035
NetP100_9: P100.9 R86.1 U6.22 | length 8756.4
  Top Layer w8: v1(305,740) 305,760 320,775 320,845 v2(389.09,914.09) ; v1(3635,1280) 3690,1225 v1(3690,230)
  Bottom Layer w8: v1@307.5,742.5 280,770 70,770 30,730 30,70 65,35 3660,35 3690,65 v1(3690,230) ; v2@392.5,917.5 549.61,760.39 U6.22@549.61,689.09 ; P100.9@3175,2823.15 3081.85,2823.15 R86.1@3030,2875 3120,2965 3280,2965 3530,2715 3635,2715 3655,2695 3655,1300 v1(3635,1280)
NetR3_2: R3.2 U3.19 | length 202.7
  Top Layer w8: v1(2465,975) 2495.67,1005.67 U3.19@2495.67,1065
  Bottom Layer w8: v1@2465,970 v1(2465,975) R3.2@2465,1070
NetR6_1: R6.1 U4.26 | length 249.7
  Bottom Layer w8: U4.26@559.13,3175.75 559.13,3120.87 570,3110 700,3110 R6.1@735,3075
NetR9_1: R9.1 U5.26 | length 293.9
  Bottom Layer w8: R9.1@850,950 v1@850,890 ; v1(855,895) v1@850,890 ; U5.26@900.87,684.25 900.87,734.13 855,780 855,885 v1@850,890
NetR16_1: R16.1 U6.26 | length 249
  Top Layer w8: R16.1@690,610 705,625 v1(705,710)
  Bottom Layer w8: U6.26@634.25,624.13 681.35,624.13 705,647.79 v1(705,710)
NetR17_2: R17.2 U6.13 | length 261
  Bottom Layer w8: R17.2@210,470 225,470 270,515 270,545 309.76,584.76 U6.13@405.91,584.76
NetR18_2: R18.2 U6.14 | length 218.5
  Bottom Layer w8: R18.2@210,550 235,550 289.45,604.45 U6.14@405.91,604.45
NetR19_2: R19.2 U6.15 | length 200.4
  Bottom Layer w8: R19.2@210,635 260,635 270.87,624.13 U6.15@405.91,624.13
NetR20_2: R20.2 U6.16 | length 225.4
  Bottom Layer w8: R20.2@210,715 275,715 346.18,643.82 U6.16@405.91,643.82
NetR32_1: R32.1 R33.1 U7.171 | length 250.1
  Top Layer w8: v1(1460,2695) 1460.2,2695.2 U7.171@1460.2,2788.7
  Bottom Layer w8: R33.1@1485,2793 1485,2720 v1(1460,2695) R32.1@1508,2695
NetR40_2: R40.2 U12.4 | length 71.3
  Top Layer w8: R40.2@3107.5,2739.94 3112.75,2734.69 U12.4@3176.61,2734.69
NetR42_2: R42.2 U12.6 | length 75.5
  Top Layer w8: R42.2@3107.5,2679.94 3122.88,2695.32 U12.6@3176.61,2695.32
NetR46_1: R46.1 U16.12 | length 158.2
  Top Layer w8: R46.1@337,2955 387.5,2904.5 387.5,2878.61 385.79,2876.9 U16.12@385.79,2818.43
NetR59_1: R59.1 U16.24 | length 150.7
  Top Layer w8: U16.24@484.21,2621.57 484.21,2575.79 492.11,2567.89 565.89,2567.89 R59.1@580,2582
NetR72_1: R72.1 U21.3 | length 350.2
  Top Layer w8: R72.1@440,825 R72.1@455,810 500,855 560,855 575,870 575,985 565,995 U21.3@510,995
NetR73_2: R73.2 R77.1 U21.6 | length 393.1
  Top Layer w8: R77.1@285,810 185,810 160,835 160,940 R73.2@190,970 215,995 U21.6@290,995
NetR74_1: R74.1 U23.2 U23.6 | length 453.8
  Bottom Layer w8: R74.1@215,1235 215,1230 255,1190 310,1190 350,1230 U23.2@390,1230 470,1230 520,1280 U23.6@610,1280
NetR75_2: R75.2 R76.2 U23.3 | length 414.4
  Top Layer w8: R75.2@215,1235 R76.2@215,1315 215,1365 v1(215,1370)
  Bottom Layer w8: v1(215,1370) 250,1405 290,1405 325,1370 325,1305 350,1280 U23.3@390,1280
NetR77_2: R77.2 U21.2 | length 215.9
  Top Layer w8: R77.2@350,810 485,945 U21.2@510,945
NetR78_1: R78.1 R80.2 U24.1 | length 204.7
  Bottom Layer w8: U24.1@558.66,1598.39 651.61,1598.39 R78.1@655,1595 720,1530 R80.2@720,1515
NetR79_1: R79.1 R81.1 U24.8 | length 224.7
  Bottom Layer w8: R81.1@210,1515 275,1580 R79.1@275,1595 278.39,1598.39 U24.8@391.34,1598.39
NetR82_1: R82.1 R84.2 U25.1 | length 206
  Top Layer w8: U25.1@558.66,1521.61 648.39,1521.61 R82.1@655,1515 720,1580 R84.2@720,1595
NetR83_1: R83.1 R85.1 U25.8 | length 226
  Top Layer w8: R85.1@210,1595 210,1580 R83.1@275,1515 281.61,1521.61 U25.8@391.34,1521.61
NetU6_20: U6.20
NetU9_2: U9.2 U11.C | length 129.9
  Bottom Layer w8: U11.C@2710,3685 2755,3685 U9.2@2815,3625
NetU13_2: U13.2 X1.2 | length 388.6
  Bottom Layer w8: X1.2@1949.02,2404.02 1934.02,2404.02 1895,2365 1895,2243.89 1923.89,2215 2000,2215 2025,2190 U13.2@2025,2145
NetU13_3: U13.3 X1.1 | length 216.6
  Bottom Layer w8: X1.1@1950,2260 2035,2260 2075,2220 U13.3@2075,2145
PA0: U7.40
PA3: J1.26 U7.47 | length 2554.4
  Top Layer w8: U7.47@1401.14,1751.3 1401.14,1648.86 v1(1415,1635) ; v1@2090,1610 2090,1660 2100,1670 2160,1670 2190,1640 2442.5,1640 2480,1602.5 v1(3160,1602.5) ; v1(3160,1795) 3255,1795 3267.13,1782.87 J1.26@3489,1782.87
  Bottom Layer w8: v1(1415,1635) 1417.56,1635 1468.56,1686 1530,1686 1531,1685 1950,1685 2020,1615 v1(2100,1615) ; v1(3160,1602.5) 3182,1624.5 3182,1773 v1(3160,1795)
PA5: J1.38 U7.51 U8.6 | length 2740.6
  Top Layer w8: v1(1405,1555) 1479.88,1629.88 U7.51@1479.88,1751.3 1479.88,1860.12 1445,1895 1445,1935 v1(1475,1965) ; v1(2140,1590) 2140,1595 2430,1595 2478.35,1546.65 J1.38@3489,1546.65
  Bottom Layer w8: v1(1405,1555) 1430,1555 1482.5,1607.5 1657.5,1607.5 1715,1665 1945,1665 2022.5,1587.5 2137.5,1587.5 v1(2140,1590) ; v1(1475,1965) U8.6@1560,1965
PA6: J1.37 U7.52 U8.5 | length 2866.7
  Top Layer w8: v1(1470,1395) 1570,1395 v1(1585,1410) ; v1(1480,1915) 1480,1895 1499.57,1875.43 U7.52@1499.57,1751.3 1499.57,1584.57 v1(1490,1575) ; v1(2185,1425) 2330,1425 2360,1455 2470,1455 2520,1405 3195,1405 v2(3280,1490) ; v2(3280,1575) 3288.66,1566.34 J1.37@3489,1566.34
  Bottom Layer w8: v1(1470,1395) 1470,1555 v1(1490,1575) ; v1(1480,1915) U8.5@1560,1915 ; v1(1585,1410) 1612.5,1437.5 1677.5,1437.5 1707,1408 1881.6,1408 1904.6,1385 2070,1385 2127.5,1442.5 2167.5,1442.5 v1(2185,1425) ; v2(3280,1490) v2(3280,1575)
PA7: U7.53 U16.11 | length 2724.1
  Top Layer w8: U16.11@405.47,2818.43 405.47,2900.47 v1@415,2910 ; v1@850,1700 v1@855,1700 ; v1(855,1715) 860,1720 965,1720 1160,1525 1168.18,1525 1170.68,1522.5 1476.39,1522.5 1519.25,1565.36 U7.53@1519.25,1751.3
  Bottom Layer w8: v1(415,2905) 405,2905 432.5,2932.5 602.5,2932.5 600,2935 790,2935 870,2855 870,1743 855,1728 v1(855,1715)
PA8: J1.24 U7.119 | length 1709.5
  Top Layer w8: U7.119@2303.7,2437.32 3072.68,2437.32 3160,2350 v1(3160,2195) ; v1(3160,1890) 3190,1860 3350,1860 3387.76,1822.24 J1.24@3489,1822.24
  Bottom Layer w8: v1(3160,1890) v1(3160,2195)
PA9: U7.120 U14.13 | length 3398.2
  Top Layer w8: U7.120@2303.7,2457.01 3082.99,2457.01 3200,2340 v2(3200,2210)
  Bottom Layer w8: v2(3200,2210) 3196,2206 3196,849 3315,730 3390,730 3505,615 3505,460 3465,420 3465,350 3270,350 3250,330 U14.13@3250,280
PA10: J1.25 U7.121 | length 1750.1
  Top Layer w8: U7.121@2303.7,2476.69 3183.31,2476.69 v2@3310,2350 ; v1(3345,1815) 3357.44,1802.56 J1.25@3489,1802.56
  Bottom Layer w8: v2(3314.5,2344.5) 3314.5,1845.5 v1(3345,1815)
PA11: R42.1 U7.122 | length 963.1
  Top Layer w8: U7.122@2303.7,2496.38 2661.38,2496.38 v2(2675,2510) ; v2(2705,2715) 2715,2715 2722.5,2722.5 2977.5,2722.5 3020,2680 R42.1@3053,2680
  Bottom Layer w8: v2(2675,2510) 2705,2540 v2(2705,2715)
PA12: R40.1 U7.123 | length 938.7
  Top Layer w8: U7.123@2303.7,2516.06 2631.06,2516.06 v2(2655,2540) ; v2(2665,2715) 2690,2740 R40.1@3053,2740
  Bottom Layer w8: v2(2655,2540) 2665,2550 v2(2665,2715)
PA13: P7.2 R23.1 U7.124 | length 780.7
  Top Layer w8: U7.124@2303.7,2535.75 2460.75,2535.75 v1(2485,2560) ; P7.2@2600,2895 2645,2940 2645,2978 R23.1@2690,3023
  Bottom Layer w8: v1(2485,2560) 2485,2566.82 2650,2731.82 2650,2845 P7.2@2600,2895
PA14: P7.1 R24.1 U7.137 | length 882.1
  Top Layer w8: U7.137@2129.49,2788.7 2129.49,2964.49 v1(2160,2995) ; P7.1@2600,2795 2690,2885 R24.1@2690,2898
  Bottom Layer w8: v1(2160,2995) 2255,2995 2450,2800 2595,2800 P7.1@2600,2795
PA15: R8.1 R15.1 U5.30 U6.30 U7.138 | length 4800.9
  Top Layer w8: R15.1@755,450 855,550 855,765 855,780 840,795 800,795 v1(795,800) ; v1(810,855) 810,920 835,945 875,945 v1(930,890) ; v1(915,1135) 1009,1229 1199.4,1229 1336.4,1366 1360.8,1366 1367.3,1372.5 1405,1372.5 1412.5,1365 1640,1365 1647.5,1372.5 1648.05,1372.5 v1(1669.55,1394) ; U7.138@2109.8,2788.7 2109.8,2045.2 v1(2170,1985) ; v1(2140,1415) 2145,1415 2165,1395 2430,1395 v1(2445,1410)
  Bottom Layer w8: U6.30@634.25,545.39 681.8,545.39 789.8,653.4 789.8,829.8 810,850 v1(810,855) ; v1(915,1135) 885,1105 885,995 R8.1@930,950 930,895 v1(930,890) 979.61,840.39 U5.30@979.61,684.25 ; v1(1669.55,1394) 1875.8,1394 1899.8,1370 2095,1370 v1(2140,1415) ; v1(2170,1985) 2215,1985 2431,1769 2431,1424 v1(2445,1410)
PA100: U7.41 U16.14 | length 2269.1
  Top Layer w8: v1(220,2500) 239.38,2480.62 239.38,2374.38 230,2365 230,2255 315,2170 315,2055 525,1845 830,1845 890.83,1905.83 U7.41@1266.3,1905.83 ; U16.14@336.57,2749.53 290.47,2749.53 285,2755 285,2820 350,2885 355,2885 v1(360,2890)
  Bottom Layer w8: v1(220,2500) 200,2520 200,2568.89 208.61,2577.5 227.3,2577.5 295,2645.2 295,2811.31 293.5,2812.81 293.5,2847.19 317.81,2871.5 341.5,2871.5 v1(360,2890)
PB0: R85.2 U7.56 U25.5 | length 1627.2
  Top Layer w8: R85.2@275,1595 278.39,1598.39 U25.5@391.34,1598.39 400,1607.05 400,1618.89 541.11,1760 1110,1760 1200,1670 1215,1670 1247.5,1637.5 1247.5,1607.5 v1(1245,1605) ; U7.56@1578.31,1751.3 1578.31,1646.69 v1(1590,1635)
  Bottom Layer w8: v1(1245,1605) 1365,1605 1385,1585 1430,1585 1480,1635 v1(1590,1635)
PB1: R84.1 U7.57 U25.4 | length 1435.3
  Top Layer w8: U25.4@558.66,1598.39 651.61,1598.39 R84.1@655,1595 655,1696 705,1746 1094,1746 1202.5,1637.5 v1@1202.5,1632.5 ; U7.57@1597.99,1751.3 1597.99,1680 1635,1642.99 v1(1635,1635)
  Bottom Layer w8: v1(1205,1635) 1210,1640 1270,1640 1270,1635 1283.5,1621.5 1378.5,1621.5 1395,1605 1430,1605 1490,1665 1605,1665 v1(1635,1635)
PB2: U7.58 U10.6 | length 585.7
  Top Layer w8: U7.58@1617.68,1751.3 1617.68,1822.68 v1(1640,1845)
  Bottom Layer w8: U10.6@1508.5,2240 1530,2240 1555,2215 1555,2150 1665,2040 1665,1870 v1(1640,1845)
PB3: P1.31 U7.161 | length 871.1
  Top Layer w8: P1.31@1585,3630 1657.05,3557.95 U7.161@1657.05,2788.7
PB4: P1.35 U7.162 | length 964.6
  Top Layer w8: v1(1620,3550) 1637.36,3532.64 U7.162@1637.36,2788.7
  Bottom Layer w8: v1@1620,3555 1710,3555 P1.35@1785,3630
PB5: P1.29 U7.163 | length 902.1
  Top Layer w8: P1.29@1485,3630 1495,3630 1617.68,3507.32 U7.163@1617.68,2788.7
PB6: U7.164 U10.1 | length 546.3
  Top Layer w8: U7.164@1597.99,2788.7 1597.99,2717.01 v1(1615,2700)
  Bottom Layer w8: v1@1610,2700 v1(1615,2700) 1615,2661.5 1821.5,2455 U10.1@1821.5,2340